# EAGLE board Proyecto final - PCB (EAGLE 9.7.0)
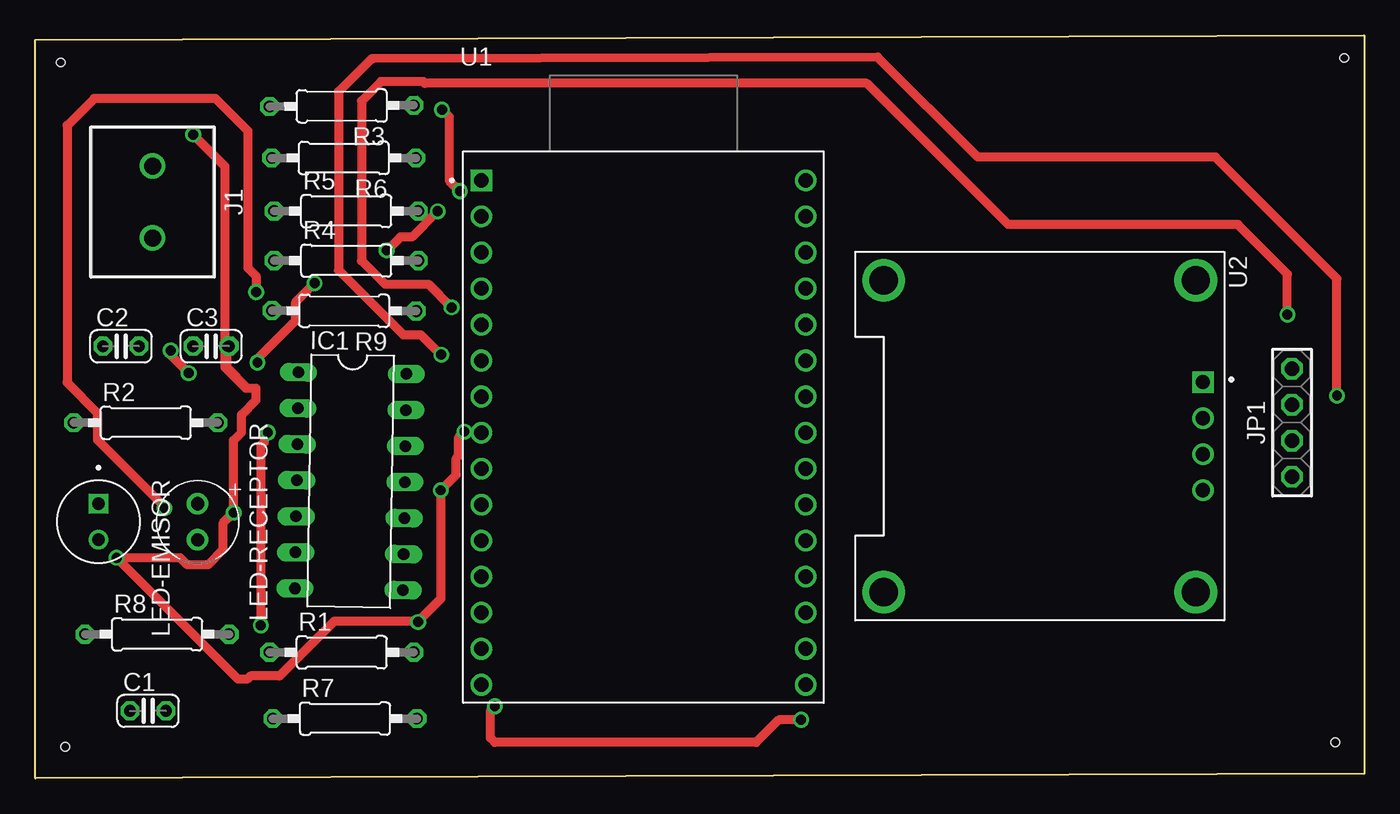
[diagram p0: board, top side]
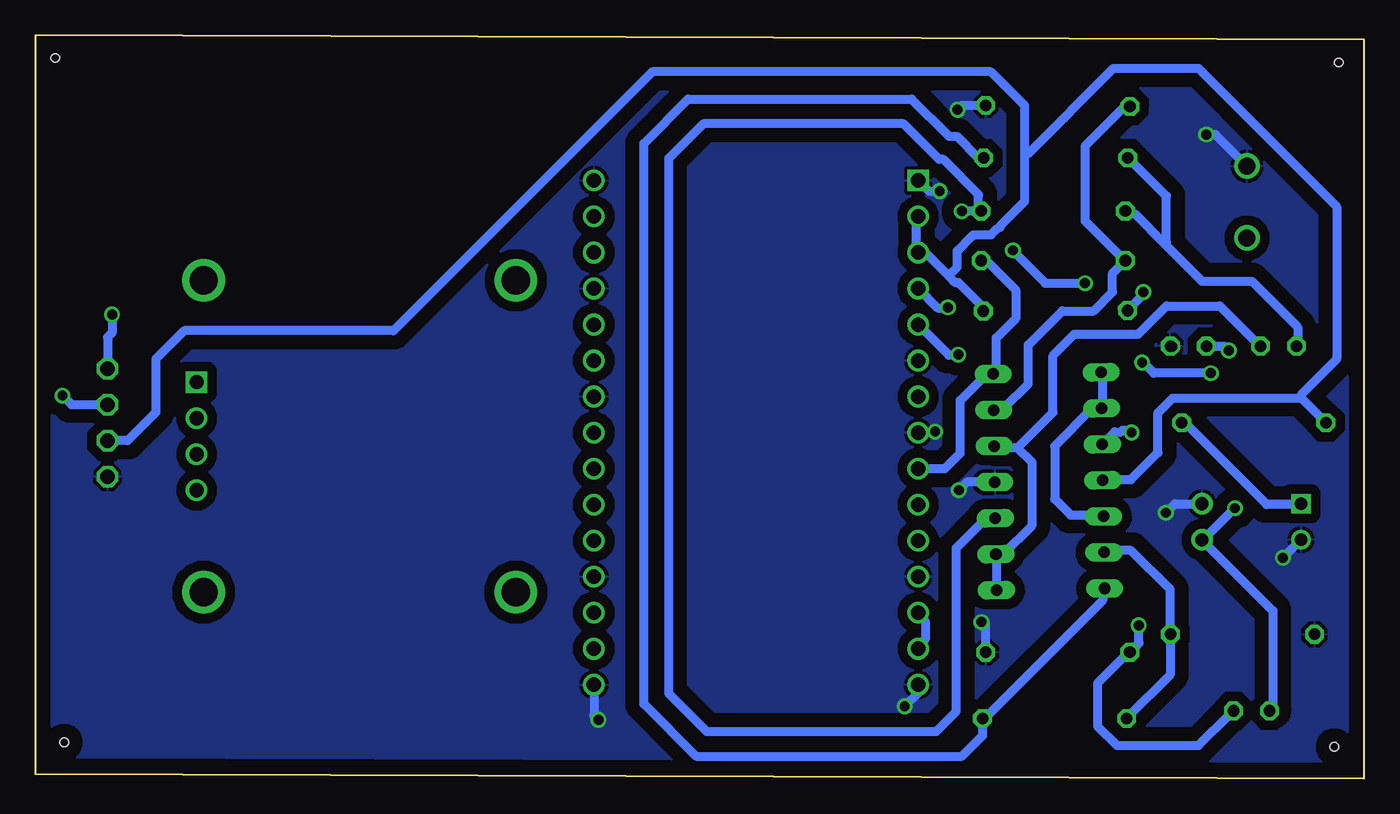
[diagram p1: board, bottom side, seen from below]

Size 93.66 x 52.39 mm. Coordinates in mm from the lower left corner, seen from the top.
Outline: 93.66,52.39 93.66,0.32 0,0 0,52.07 93.66,52.39
Copper layers (1*16): Top / Bottom
Stack-up Default Layer Stack: Top SilkScreen Epoxy Ink / Top SolderMask SR:Green 0.0254mm Dk 4.3 / Top Surface Finish Lead-Free 0.02mm / Top CuFoil:007 0.035mm / Dielectric-1 User Defined 1.5mm / Bottom CuFoil:007 0.035mm / Bottom Surface Finish Lead-Free 0.02mm / Bottom SolderMask SR:Green 0.0254mm Dk 4.3 / Bottom SilkScreen Epoxy Ink
Design rules: minimum copper width 0.62mm, minimum drill size 0.35mm, copper clearance wire_polygon to wire_polygon 0.5mm, copper clearance wire_polygon to pad_smd 0.7mm, copper clearance wire_polygon to via 0.9mm, copper clearance pad_smd to pad_smd 0.15mm, copper clearance pad_smd to via 0.4mm, copper clearance via to via 1mm, copper clearance smd to pad (same net) 0.15mm, copper clearance smd to via (same net) 0.15mm, copper clearance smd to smd (same net) 0.4mm, dimension clearance 40mil, via restrict clearance 0.2mm, restrict clearance 0.2mm, drill distance 6mil, keepout clearance 0mil
Holes 0.6 mm at 92.27,50.8 91.64,2.54 1.78,50.48 2.1,2.22

## Footprints (pad centres in the part's own frame; a part is rotated, then mirrored left to right if it is on the bottom)
C025-024X044 = drill 0.813 octagon: 1 -1.27,0; 2 1.27,0
DIL14 = drill 0.813 long: 1 -7.62,-3.81; 2 -5.08,-3.81; 3 -2.54,-3.81; 4 0,-3.81; 5 2.54,-3.81; 6 5.08,-3.81; 7 7.62,-3.81; 8 7.62,3.81; 9 5.08,3.81; 10 2.54,3.81; 11 0,3.81; 12 -2.54,3.81; 13 -5.08,3.81; 14 -7.62,3.81
TERMBLK_508-2N = drill 1.2: 1 -2.54,0; 2 2.54,0
1X04 = drill 1.016 octagon: 1 -3.81,0; 2 -1.27,0; 3 1.27,0; 4 3.81,0
LEDRD254W51D580H870 = drill 0.87 square: 1 -1.27,0 | drill 0.87: 2 1.27,0
LEDRD254W51D580H541B = drill 0.921 pad 1.521: A -1.27,0; C 1.27,0
0207/10 = drill 0.813 octagon: 1 -5.08,0; 2 5.08,0
XCVR_ESP32-C3-DEVKITM-1 = drill 1.02 square: 1 -11.43,17.395 | drill 1.02: 2 -11.43,14.855; 3 -11.43,12.315; 4 -11.43,9.775; 5 -11.43,7.235; 6 -11.43,4.695; 7 -11.43,2.155; 8 -11.43,-0.385; 9 -11.43,-2.925; 10 -11.43,-5.465; 11 -11.43,-8.005; 12 -11.43,-10.545; 13 -11.43,-13.085; 14 -11.43,-15.625; 15 -11.43,-18.165; 16 11.43,-18.165; 17 11.43,-15.625; 18 11.43,-13.085; 19 11.43,-10.545; 20 11.43,-8.005; 21 11.43,-5.465; 22 11.43,-2.925; 23 11.43,-0.385; 24 11.43,2.155; 25 11.43,4.695; 26 11.43,7.235; 27 11.43,9.775; 28 11.43,12.315; 29 11.43,14.855; 30 11.43,17.395
MODULE_DM-OLED096-636 = drill 1 square: 1 -3.81,11.5 | drill 1: 2 -1.27,11.5; 3 1.27,11.5; 4 3.81,11.5 | drill 2: S1 -11,11; S2 11,11; S3 11,-11; S4 -11,-11

## Placement (x,y rotation side)
C1  1uf  [C025-024X044]  7.94,4.76 0 top
C2  1uf  [C025-024X044]  6.03,30.48 0 top
C3  1uf  [C025-024X044]  12.38,30.48 0 top
IC1  LM324N  [DIL14]  22.23,20.95 269.1 top
J1  2828XX-2282837-2  [TERMBLK_508-2N]  8.25,40.64 270 top
JP1  PINHD-1X4  [1X04]  88.58,25.08 90 top
LED-EMISOR  OVLFR3C7  [LEDRD254W51D580H870]  4.45,18.1 270 top
LED-RECEPTOR  PHOTODIODE  [LEDRD254W51D580H541B]  11.43,18.1 270 top
R1  100K  [0207/10]  21.59,8.89 0 top
R2  250  [0207/10]  7.77,25.08 0 top
R3  1K  [0207/10]  21.59,47.42 180.5 top
R4  10K  [0207/10]  21.91,36.51 0 top
R5  22K  [0207/10]  21.91,40 0 top
R6  22K  [0207/10]  21.74,43.75 180 top
R7  5.1K  [0207/10]  21.82,4.22 0 top
R8  1K  [0207/10]  8.57,10.16 0 top
R9  10K  [0207/10]  21.76,32.97 179.8 top
U1  ESP32-C3-DEVKITM-1  [XCVR_ESP32-C3-DEVKITM-1]  42.86,24.77 0 top
U2  DM-OLED096-636  [MODULE_DM-OLED096-636]  70.8,24.13 270 top

## Library data of the parts
C1-C3 = BeagleBone_Black_Wireless
IC1 = linear
J1 = Connector; CATEGORY_L1: Connectors; CATEGORY_L2: Terminal Blocks; CATEGORY_L3: Screw Terminal - Rising Cage Clamp Side Wire Entry; DATASHEET: https://www.te.com/usa-en/product-282837-2.datasheet.pdf; DESCRIPTION: 2 Position Wire to Board Terminal Block Horizontal with Board 0.200" (5.08mm) Through Hole; MANUFACTURER: TE Connectivity AMP Connectors; MPN: 282837-2; OPERATING_TEMPERATURE: -40°C ~ 105°C; PACKAGE: Through Hole; PACKAGE_SIZE: NA; PART_STATUS: Active; PITCH: 0.200" (5.08mm); ROHS: Compliant; SERIES: Buchanan
JP1 = Connector; CATEGORY_L1: Connectors; CATEGORY_L2: Headers; CATEGORY_L3: Male Pins; DESCRIPTION: Header-Straight-4 Position; PACKAGE: Through Hole; PITCH: 0.100" (2.54mm)
LED-EMISOR = OVLFR3C7; AVAILABILITY: In Stock; CHECK_PRICES: https://www.snapeda.com/parts/OVLFR3C7/TT+Electronics%252FOptek+Technology/view-part/?ref=eda; DESCRIPTION: LED 5mm Round Red 30 deg. | Optek (TT Electronics) OVLFR3C7; MF: TT Electronics/Optek Technology; MP: OVLFR3C7; PACKAGE: Radial TT Electronics/Optek Technology; PRICE: None; SNAPEDA_LINK: https://www.snapeda.com/parts/OVLFR3C7/TT+Electronics%252FOptek+Technology/view-part/?ref=snap
LED-RECEPTOR = Tinkercad
R1-R9 = rcl; SPICEPREFIX: R
U1 = ESP32-C3-DEVKITM-1; AVAILABILITY: In Stock; CHECK_PRICES: https://www.snapeda.com/parts/ESP32-C3-DEVKITM-1/Espressif+Systems/view-part/?ref=eda; DESCRIPTION: WiFi Development Tools (802.11) (ENGINEERING SAMPLE ONLY) ESP32-C3 General-Purpose Dev Board, Embeds ESP32-C3-MINI-1, 4 MB Flash, w/ Pin Header; MF: Espressif Systems; MP: ESP32-C3-DEVKITM-1; PACKAGE: None; PRICE: None; SNAPEDA_LINK: https://www.snapeda.com/parts/ESP32-C3-DEVKITM-1/Espressif+Systems/view-part/?ref=snap
U2 = DM-OLED096-636; AVAILABILITY: Not in stock; CHECK_PRICES: https://www.snapeda.com/parts/DM-OLED096-636/Display+Module/view-part/?ref=eda; DESCRIPTION: 0.96” 128 X 64 MONOCHROME GRAPHIC OLED DISPLAY MODULE - I2C; MF: Display Module; MP: DM-OLED096-636; PACKAGE: Package; PRICE: None; SNAPEDA_LINK: https://www.snapeda.com/parts/DM-OLED096-636/Display+Module/view-part/?ref=snap

## Nets
5V: U1.13 U1.14
AGND: C3.2 IC1.11 J1.1 JP1.1 LED-EMISOR.2 LED-RECEPTOR.A R1.2 R3.1 R8.1 U1.1 U1.6 U1.8 U1.12 U1.15 U1.16 U1.19 U1.24 U1.27 U1.30
GND: U2.1
N$1: IC1.1 IC1.2 IC1.5
N$2: IC1.6 R7.1 R8.2
N$3: IC1.7 R6.1 R7.2
N$4: C2.1 R5.1 R6.2
N$5: C3.1 IC1.10 R5.2
N$6: J1.2
N$7: IC1.14 R4.2 U1.9
N$8: IC1.13 R3.2 R4.1
N$9: C1.2 IC1.3 R1.1
N$10: LED-EMISOR.1 R2.2
N$11: C1.1 LED-RECEPTOR.C R9.2
N$12: C2.2 IC1.8 IC1.9 IC1.12
SCL: JP1.3 U1.5
SDA: JP1.4 U1.4
VCC: IC1.4 JP1.2 R2.1 R9.1 U1.2 U1.3
VCC_IN: U2.2

## Tracks (layer width: path | path; a pad name or v marks a point on that pad's centre or on a via)
5V
  Bottom 0.62: U1.14 31.42,9.31 30.92,9.81 30.92,11.06 31.42,11.56 U1.13
AGND  (via drill 0.7 pad 1)
  Top 0.62: v11.11,45.4 13.37,43.15 13.37,28.98 14.85,27.5 15.56,27.5 | v28.66,47.16 29.17,46.64 29.17,42.16 v29.92,41.41 | 26.98,11.07 28.58,12.67 v28.58,20.32 29.66,21.4 29.66,22.58 29.84,22.76 29.84,24.06 v30.23,24.45 | 26.98,11.07 21.06,11.07 17.2,7.22 15.16,7.22 14.92,6.98 14.29,6.98 v5.72,15.56 10.2,15.56 10.7,15.06 12.16,15.06 13.2,16.09 13.2,17.96 v13.97,18.73 13.97,23.84 14.52,24.39 14.52,25.63 15.56,26.67 15.56,27.5 | v53.97,4.13 52.39,4.13 50.8,2.54 32.38,2.54 32.07,2.86 32.07,4.76 v32.38,5.08 | 15.56,27.5 14.97,27.5 13.5,28.97 v13.5,30.44 | 26.98,11.07 v26.98,11.02 | v26.98,11.02 | 26.98,11.07 v26.98,11.02
  Bottom 0.62: J1.1 10.48,45.4 v11.11,45.4 | LED-EMISOR.2 v5.72,15.56 | v13.97,18.73 13.34,19.37 LED-RECEPTOR.A | v28.66,47.16 28.35,47.46 R3.1 | IC1.11 28,20.89 v28.58,20.32 | R1.2 26.67,10.76 26.93,11.02 v26.98,11.02 | U1.8 30.3,24.38 v30.23,24.45 | U1.16 54.29,4.45 v53.97,4.13 | v32.38,5.08 31.43,6.03 U1.15 | v13.5,30.44 13.61,30.44 C3.2 | U1.1 30.68,41.41 v29.92,41.41
  pour Bottom: 0.32,51.75 93.34,51.75 93.34,0.63 0.32,0.63
N$1
  Bottom 0.62: IC1.5 18.42,18.56 20.67,18.56 21.8,19.69 21.8,23.44 19.17,26.06 18.67,26.06 IC1.2 18.42,26.31 18.42,28.56 IC1.1
N$2
  Bottom 0.62: R7.1 16.67,4.31 13.67,7.31 13.67,10.06 R8.2 13.67,10.31 13.67,13.31 16.42,16.06 18.17,16.06 IC1.6
N$3
  Bottom 0.62: IC1.7 18.42,13.31 18.42,12.56 26.67,4.31 R7.2 26.9,3 28.34,1.56 47.09,1.56 50.78,5.25 50.78,44.77 47.64,47.9 31.9,47.9 29.26,45.27 28.71,45.27 27.19,43.75 R6.1
N$4
  Bottom 0.62: 14.05,37.69 16.17,39.81 16.67,39.81 R5.1 | 14.05,37.69 11.42,35.06 7.92,35.06 4.67,31.81 4.67,30.56 C2.1 | R6.2 16.42,43.56 13.92,41.06 13.92,37.81 14.05,37.69
N$5  (via drill 0.7 pad 1)
  Top 0.62: v28.36,39.99 26.55,38.18 25.73,38.18 24.79,37.23 v24.75,37.23 | 15.56,29.5 18.35,32.29 18.35,32.95 18.35,33.59 v19.67,34.91 | 15.56,29.21 15.56,29.5 | v10.79,28.58 9.52,29.84 9.52,30.15 v9.54,30.16 | 15.56,29.5 15.65,29.41 v15.65,29.32
  Bottom 0.62: IC1.10 26.17,18.31 26.67,18.31 28.74,16.24 28.74,4.73 30.16,3.32 46.35,3.32 49.03,6 49.03,43.7 46.58,46.15 32.47,46.15 29.96,43.65 29.66,43.65 27.17,41.16 27.17,40.06 R5.2 27.94,40 27.95,39.99 v28.36,39.99 | v10.79,28.58 14.83,28.58 15.57,29.32 v15.65,29.32 | C3.1 9.84,30.48 v9.54,30.17 v9.54,30.16 | v24.75,37.23 24.75,37.2 22.48,34.92 19.69,34.92 v19.67,34.91
N$7
  Bottom 0.62: R4.2 26.87,36.63 26.74,36.63 24.56,34.45 24.56,32.43 25.92,31.06 25.92,28.56 IC1.14 26.6,28.51 28.46,26.66 28.46,22.93 29.55,21.84 U1.9
N$8
  Bottom 0.62: R3.2 16.67,47.56 19.67,44.56 19.67,39.31 16.92,36.56 R4.1 17.73,35.61 17.73,34.3 19.06,32.97 21.27,32.97 23.67,30.56 23.67,27.81 25.42,26.06 25.92,26.06 IC1.13
N$9  (via drill 0.7 pad 1)
  Top 0.62: v16.39,24.38 v16.39,24.39 16.29,24.48 16.14,24.33 16.14,23.72 15.89,23.46 v15.89,10.79
  Bottom 0.62: C1.2 9.42,4.56 11.67,2.31 17.42,2.31 18.79,3.68 18.79,6.7 16.67,8.81 R1.1 15.88,9.52 v15.88,10.78 v15.89,10.79 | IC1.3 17.57,24.44 17.12,24.44 17.01,24.56 16.56,24.56 v16.39,24.38
N$10
  Bottom 0.62: LED-EMISOR.1 4.67,19.31 6.87,19.31 12.64,25.08 R2.2
N$11  (via drill 0.7 pad 1)
  Top 0.62: v15.56,34.29 15.56,35.42 14.99,35.99 14.99,45.66 12.7,47.94 4.13,47.94 2.22,46.04 2.22,27.91 4.36,25.77 4.36,23.89 9.21,19.05 v9.1,19.05
  Bottom 0.62: C1.1 6.42,4.81 6.42,11.81 LED-RECEPTOR.C 11.37,16.83 9.15,19.05 v9.1,19.05 | R9.2 15.56,34.11 v15.56,34.29
N$12
  Bottom 0.62: IC1.8 25.92,13.31 25.92,15.81 IC1.9 25.67,15.81 25.42,15.81 23.42,17.81 23.42,22.31 24.42,23.31 | 24.42,23.31 21.92,25.81 21.92,29.81 20.42,31.31 15.92,31.31 13.92,33.31 10.17,33.31 7.42,30.56 C2.2 | 24.42,23.31 25.92,23.31 IC1.12
SCL  (via drill 0.7 pad 1)
  Top 0.62: 59.37,50.87 66.43,43.81 83.19,43.81 91.76,35.24 v91.76,26.99 | 59.37,50.87 23.76,50.75 23.69,50.75 21.37,48.43 21.37,35.83 25.92,31.28 27.14,31.28 28.55,29.87 v28.6,29.87 | 59.37,50.87
  Bottom 0.62: U1.5 29.28,29.84 28.63,29.84 v28.6,29.87 | v91.76,26.99 91.12,26.35 JP1.3
SDA  (via drill 0.7 pad 1)
  Top 0.62: v88.27,32.7 88.27,35.56 84.77,39.05 68.58,39.05 58.61,49.02 27.47,49.02 27.35,49.14 25.96,49.13 24.36,49.13 22.99,47.76 22.99,36.5 24.65,34.84 27.71,34.84 v29.34,33.21
  Bottom 0.62: U1.4 30.07,33.17 29.37,33.17 v29.34,33.21 | v88.27,32.7 88.27,31.43 88.58,31.11 JP1.4
VCC
  Bottom 0.62: 4.42,26.81 2.92,25.31 R2.1 | IC1.4 18.17,21.06 16.42,21.06 14.52,22.97 14.52,25.77 13.49,26.81 10.06,26.81 4.42,26.81 | 29.3,35.44 30.92,37.06 31.42,37.06 U1.3 31.56,37.2 31.56,39.5 U1.2 | 23.92,44.06 23.92,47.43 26.31,49.81 50.17,49.81 68.42,31.56 83.17,31.56 85.17,29.56 85.17,25.81 87.17,23.81 88.42,23.81 JP1.2 | 29.3,35.44 28.67,36.06 28.67,37.19 27.63,38.23 27.52,38.33 26.3,38.33 25.88,38.75 25.65,38.87 25.6,39.03 23.92,40.71 23.92,44.06 | 4.42,26.81 4.42,27.06 1.92,29.56 1.92,40.31 11.67,50.06 17.67,50.06 23.67,44.06 23.92,44.06 | 29.3,35.44 28.83,34.97 28.61,34.97 26.84,33.21 R9.1